# Altium PCB ETR_CELLMETER_SLAVE.PcbDoc (part 3 of 3)
Units mm, origin at the board's own origin, x right, y up, seen from the top; angles counter-clockwise.
Board outline 150 x 85 mm, 4 copper layers (Top Layer, GND, PWR, Bottom Layer), stack 1.306 mm thick; 204 components, 127 nets, 635 pads, 234 vias.
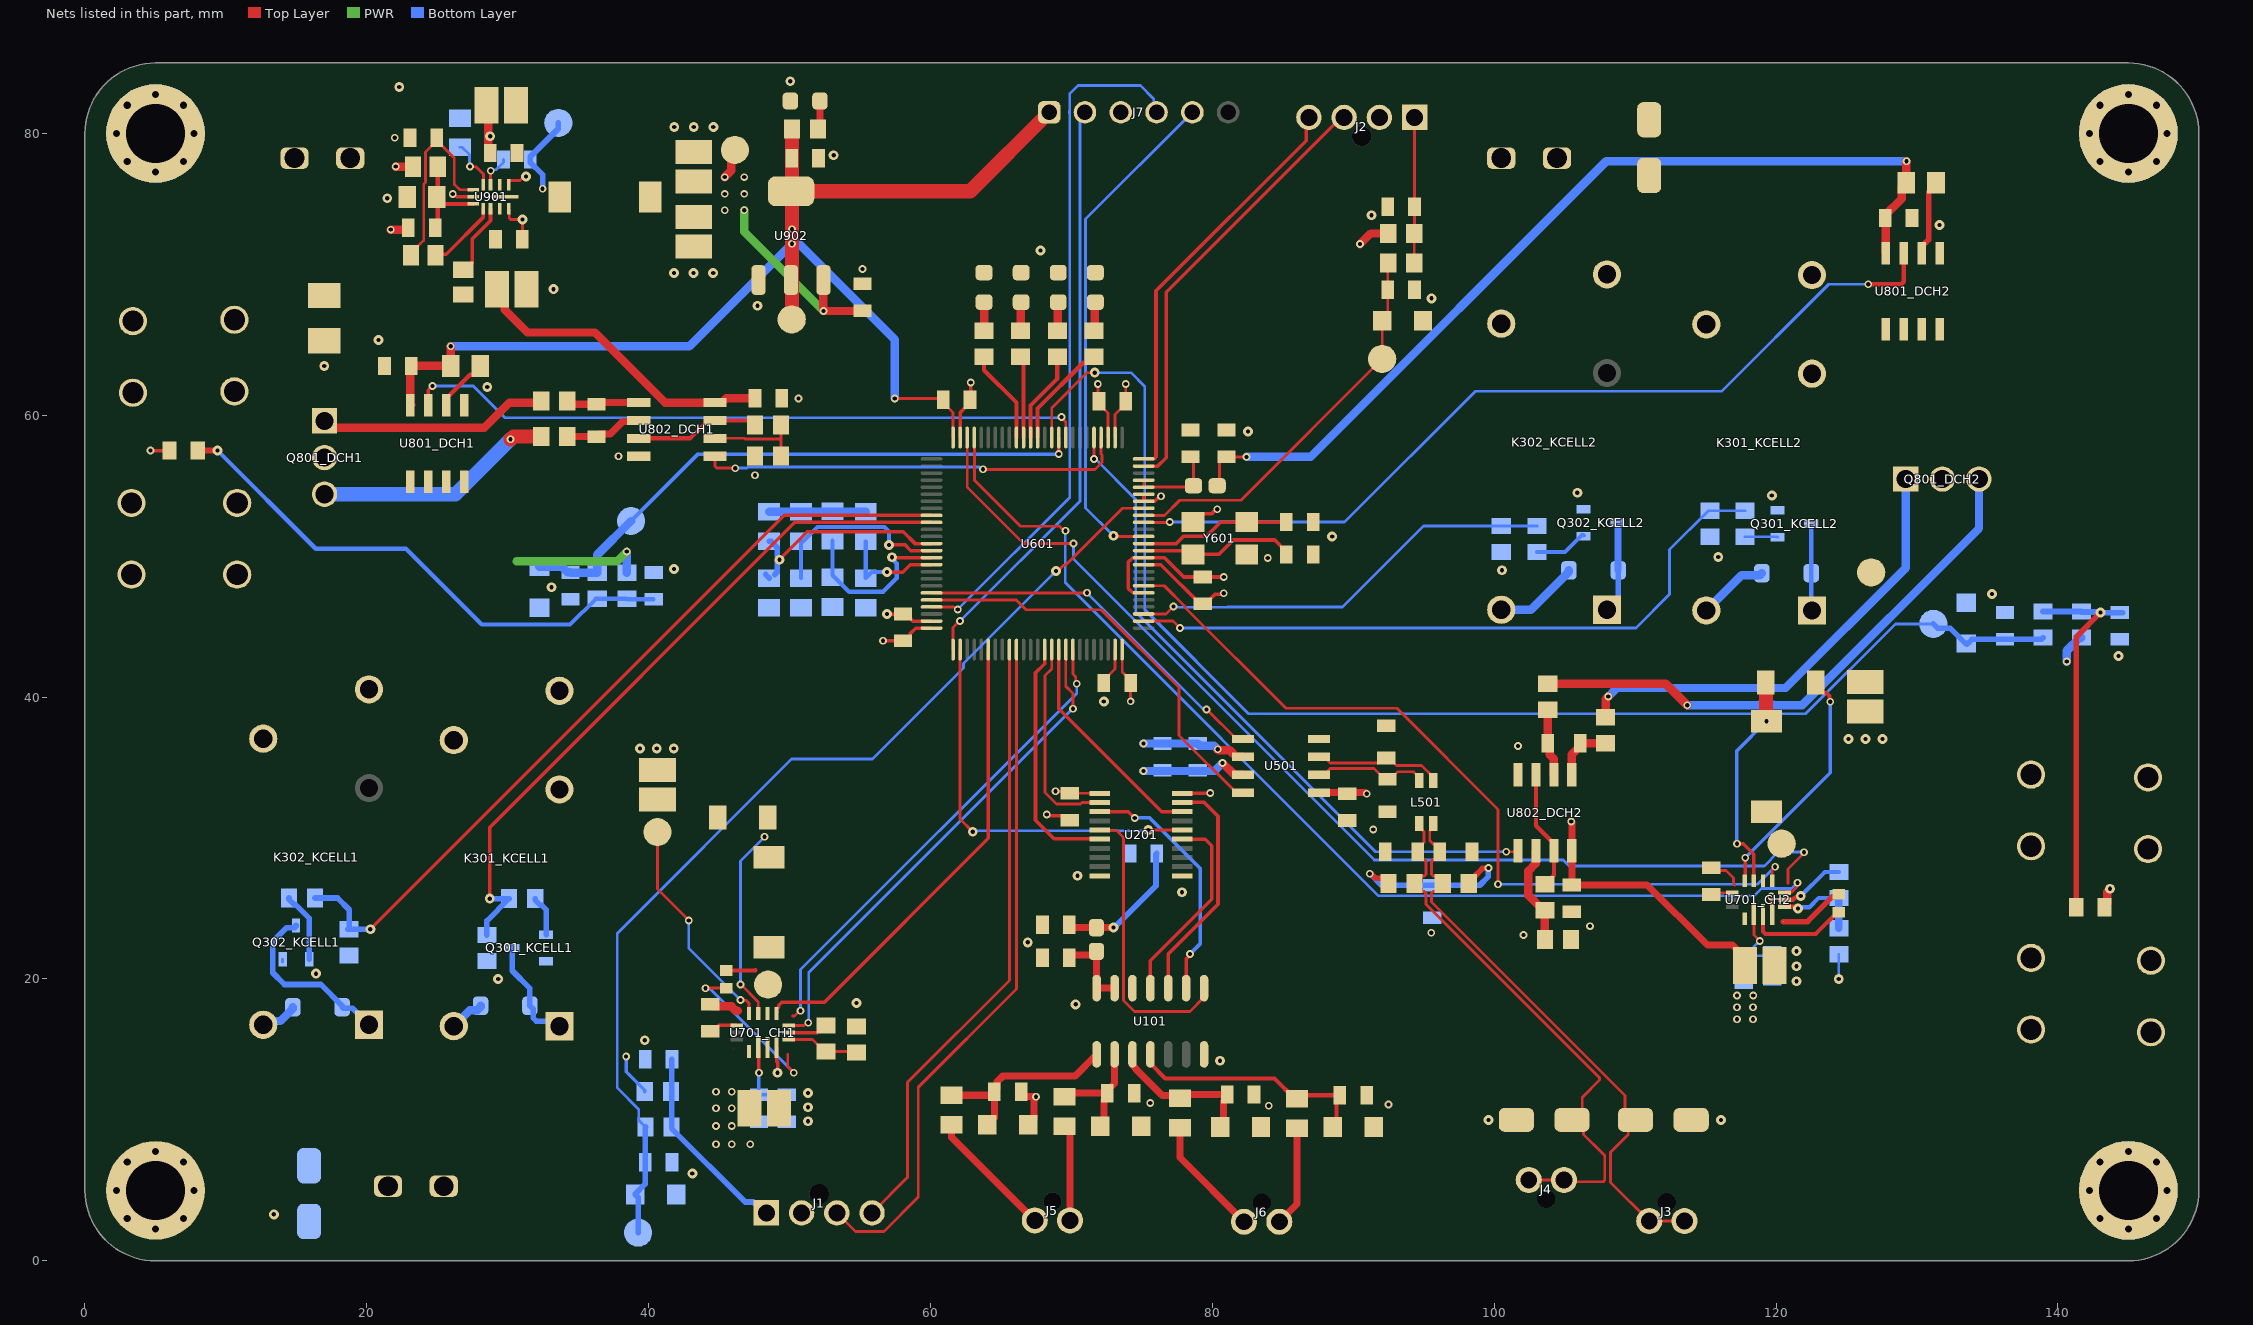
[diagram p4: the nets of this part, all layers, seen from the top]

## Part data (continued)
U902: library part LDO_10V-0.8/3V3-SOT223, "LDO Regulator Pos 3.3V 0.8A 4-Pin(3+Tab) SOT-223 T/R / IC REG LDO 3.3V 0.8A SOT223", Case/Package=SOT-223, Current Rating=800A, Dropout Voltage=1.2V, Manufacturer="Texas Instruments", Max Input Voltage=15V, Max Operating Temperature=125°C, Max Output Current=800mA, Max Supply Voltage=10V, Min Input Voltage=2.6V, Min Operating Temperature=-40°C, Min Supply Voltage=4.75V, Nominal Output Voltage=3.3V, Output Voltage Accuracy=1%, Package Quantity=1000, Quiescent Current=15mA, Supplier Part Number 1=LM1117IMP-3.3/NOPBCT-ND, .Creator=GP, Accuracy=1%, Category=LDO, ComponentLink1Description=Datasheet, ComponentLink1URL=https://www.ti.com/lit/ds/symlink/lm1117.pdf?HQS=dis-mous-null-mousermode-dsf-pf-null-wwe&DCM=yes&ref_url=https%3A%2F%2Fwww.mouser.de%2F&distId=26, ComponentLink2Description="Where buy it", ComponentLink2URL=https://www.mouser.es/ProductDetail/Texas-Instruments/LM1117IMP-33-NOPB?qs=X1J7HmVL2ZFbpN1TgOsjYQ%3D%3D, ComponentLink3Description=https://datasheet.ciiva.com/27051/1281318-27051810.pdf?src-supplier=Jameco, ComponentLink3URL=https://datasheet.ciiva.com/27051/1281318-27051810.pdf?src-supplier=Jameco, ComponentLink4Description=https://datasheet.ciiva.com/8042/1670636-8042261.pdf?src-supplier=Element14, ComponentLink4URL=https://datasheet.ciiva.com/8042/1670636-8042261.pdf?src-supplier=Element14, ComponentLink5Description=https://datasheet.ciiva.com/1570/1849796-1570171.pdf?src-supplier=Farnell, ComponentLink5URL=https://datasheet.ciiva.com/1570/1849796-1570171.pdf?src-supplier=Farnell, ComponentLink6Description=https://datasheet.ciiva.com/14149/lm1117-eng-tds-14149980.pdf?src-supplier=Distrelec, ComponentLink6URL=https://datasheet.ciiva.com/14149/lm1117-eng-tds-14149980.pdf?src-supplier=Distrelec, ComponentLink7Description=https://datasheet.ciiva.com/46386/1882372-46386042.pdf?src-supplier=Element14, ComponentLink7URL=https://datasheet.ciiva.com/46386/1882372-46386042.pdf?src-supplier=Element14, ComponentLink8Description=https://datasheet.ciiva.com/3223/lm1117-n-3223515.pdf?src-supplier=Avnet, ComponentLink8URL=https://datasheet.ciiva.com/3223/lm1117-n-3223515.pdf?src-supplier=Avnet, ComponentLink9Description=https://datasheet.ciiva.com/6580/lm1117-n-6580030.pdf?src-supplier=Digi-Key, ComponentLink9URL=https://datasheet.ciiva.com/6580/lm1117-n-6580030.pdf?src-supplier=Digi-Key, ComponentLink10Description=https://datasheet.ciiva.com/6580/lm1117-n-6580026.pdf?src-supplier=Digi-Key, ComponentLink10URL=https://datasheet.ciiva.com/6580/lm1117-n-6580026.pdf?src-supplier=Digi-Key, Height=1.6mm, Lead Free="Lead Free", Length=6.5mm, Manufacturer Part Number=LM1117IMP-3.3/NOPB, Min Current Limit=800mA, Mount="Surface Mount", Number of Outputs=1, Number of Pins=4, Number of Regulators=1, Output Current=800mA, Output Type=Fixed, Output Voltage=3.3V, Packaging="Tape and Reel", Polarity=Positive, Pricing 1="1=1,41000, 10=1,26300, 25=1,19920, 100=0,98500, 250=0,92072, 500=0,81366 (USD)", Radiation Hardening=No, REACH SVHC="No SVHC", RoHS=Yes, RoHS Compliant=Yes, Supplier 1=Digi-Key, Termination=SMD/SMT, Width=3.56mm
Y601: library part CMP-003-00000-1, "WE-XTAL Quartz Crystal, SMT, CFPX-104, 16MHz, +/-50ppm", Case/Package=CFPX-104, Frequency=16MHz, Frequency Stability=+/-50ppm, Load Capacitance=18pF, Manufacturer="Wurth Elektronik", Operating Temperature Max=60°C, Operating Temperature Min=-10°C, Category=Crystals, Component Type=Standard, ComponentLink1Description="Website Link", ComponentLink1URL=https://www.we-online.com/redexpert/article/830030819?ad, ComponentLink2Description="Datasheet Link", ComponentLink2URL=https://www.we-online.com/redexpert/spec/830030819?ad, Design Item ID=830030819, Frequency Tolerance=+/-50ppm, Height=1mm, Length=5mm, Manufacturer Part Number=830030819, Match Code=WE-XTAL, Mount="Surface Mount", Packaging="Tape and Reel", Pins=4, Source=WE-XTAL.SchLib, Width=3.2mm
Z101 Z102 Z103 Z104 Z401_NTC1 Z401_NTC2 Z401_NTC3 Z401_NTC4: library part CMP-004-00008-1, "Zener Diode, 5.1V V(Z), 2%, 0.8W, Silicon, Unidirectional, DO-219AB", Max Operating Temperature=175°C, Min Operating Temperature=-65°C, Pins=2, RoHS Compliant=Yes

## Via types
v1: diameter 0.55, hole 0.3, Top Layer to Bottom Layer, 106 vias
v2: diameter 0.7, hole 0.3, Top Layer to Bottom Layer, tented both sides, 76 vias
v3: diameter 0.7, hole 0.5, Top Layer to Bottom Layer, tented both sides, 32 vias
v4: diameter 0.55, hole 0.3, Top Layer to Bottom Layer, tented both sides, 11 vias
v5: diameter 4.4, hole 4.2, Top Layer to Bottom Layer, tented both sides, 4 vias
v6: diameter 2.5, hole 2.3, Top Layer to Bottom Layer, tented both sides, 3 vias
v7: diameter 0.7, hole 0.3, Top Layer to Bottom Layer, 2 vias

## Nets (pads, with @x,y where several pads share a name; then routed paths per layer and width w, separated by ;. In a path a pad name is that pad's centre, name@x,y a point inside that pad or via, vN(x,y) a via of type N, cw(c..) or ccw(c..) an arc to the next point about the centre after c; other vN are vias at no path point)
3V3_A: C602.2 L601.2 U601.21 U601.22 | length 6.2
  Top Layer w0.2: U601.22@75.125,55.4 U601.21@75.125,54.9 75.135,54.91 78.57,54.91 L601.2@78.66,55 78.66,56.84 C602.2@78.45,57.05
3V3_MCU: C201.2 C505.2 C601.2 C603.2 C604.2 C605.2 C606.2 C607.2 C801_DCH1.1 C801_DCH2.1 C910.2 J7.1 L601.1 R801_DCH1.2 R801_DCH2.2 R906.2 TP903.1 U201.1 U501.5 U601.6 U601.11 U601.28 U601.50 U601.75 U601.100 U801_DCH1.8 U801_DCH2.8 U902.2 U902.4 | length 184.8
  Top Layer w0.2: v1(57.458,61.2) 60.55,61.2 60.85,60.9 60.9,60.9 61.6,60.2 U601.50@61.6,58.425 ; v1(68.864,33.314) 69.736,33.314 C201.2@69.875,33.175 U201.1@72.025,33.175 ; v1(71.875,62.225) 71.875,61.075 C603.2@71.95,61 71.95,60.8 72.6,60.15 U601.28@72.6,58.425 ; U601.100@73.6,43.375 73.6,41.8 74.2,41.2 C605.2@74.2,41 v1(74.2,39.7) ; L601.1@80.34,55 80.5,55.16 80.5,56.7 80.85,57.05 C601.2@81,57.05 v1(82.425,57.05)
  Top Layer w0.25: v1(56.631,43.995) C606.2@58.042,43.995 58.242,43.995 58.567,44.32 58.567,44.52 58.946,44.9 U601.75@60.075,44.9 ; U601.6@75.125,47.4 74.339,47.4 74.025,47.714 74.025,49.586 74.339,49.9 U601.11@75.125,49.9 76.6,49.9 77.975,48.525 v1(80.8,48.525)
  Top Layer w0.5: U501.5@87.575,33.22 90.866,33.22 90.936,33.15 v1(90.95,33.15)
  Top Layer w0.6: U801_DCH1.8@23.15,60.755 U801_DCH1.8@23.095,60.7 23.095,63.445 C801_DCH1.1@23.15,63.5 R801_DCH1.2@25.95,63.5 v1(25.95,64.9) ; U801_DCH2.8@127.795,71.5 127.79,71.505 127.79,73.96 C801_DCH2.1@127.75,74 127.75,74.2 128.925,75.375 128.925,76.175 R801_DCH2.2@129.25,76.5 v1(129.25,78.025)
  Top Layer w1: U902.4@50.1,75.9 U902.4@50.163,75.9 ; TP903.1@50.15,66.8 50.163,66.813 v1(50.163,72.175) v1(50.163,73.2) U902.4@50.163,75.9 ; R906.2@50.175,80.3 50.163,80.288 U902.4@50.163,75.9 ; J7.1@68.42,81.5 62.82,75.9 U902.4@50.163,75.9
  Bottom Layer w0.6: v1(25.95,64.9) 42.888,64.9 v1(50.163,72.175) 50.66,72.175 57.458,65.377 v1(57.458,61.2) ; v1(82.425,57.05) 86.975,57.05 107.95,78.025 v1(129.25,78.025)
+3V3: R601.2 R602.2 R603.2 R604.2 | length 6.9
  Bottom Layer w0.6: R601.2@48.55,53.15 R602.2@50.8,53.15 53.05,53.15 R604.2@55.4,53.15
+5V: C105.2 C202.2 C501.2 C502.2 C902.2 C903.2 C904.2 C911.2 D301_KCELL1.K D301_KCELL2.K D302_KCELL1.K D302_KCELL2.K K301_KCELL1.A2 K301_KCELL2.A2 K302_KCELL1.A2 K302_KCELL2.A2 L101.1 L901.2 R401_NTC1.2 R401_NTC2.2 R401_NTC3.2 R401_NTC4.2 R902.2 TP902.1 U201.20 U501.3 U902.3 | length 72
  Top Layer w0.25: U201.20@77.875,33.175 79.75,33.175 79.775,33.2 v1(79.85,33.2)
  Top Layer w0.5: C105.2@69.852,23.85 69.852,23.84 70.052,23.64 L101.1@71.728,23.64 ; L101.1@71.771,23.64 71.776,23.644 72.976,23.644 v2(72.98,23.649)
  Top Layer w0.6: v1(21.7,73.175) 22.825,73.175 C904.2@22.95,73.3 ; v1(22.05,77.65) R902.2@23.283,77.65 ; v1(45.4,76.9) 45.85,77.35 45.85,78.56 TP902.1@46.118,78.828 ; U902.3@52.4,69.6 v1(52.4,67.4) 55.15,67.4 C911.2@55.175,67.425 ; v1(80.725,35.325) 81.56,34.49 U501.3@82.175,34.49 ; v1(90.475,72.15) 91.225,72.9 R401_NTC1.2@92.475,72.9
  PWR w0.6: 30.631,49.65 37.775,49.65 v1(38.45,50.325) ; v1(46.787,74.55) 46.787,73.013 v1(52.4,67.4)
  Bottom Layer w0.25: v1(38.4,14.5) 38.4,13.425 39.725,12.1 R401_NTC2.2@39.725,12
  Bottom Layer w0.4: v2(72.98,23.649) 73.034,23.649 76,26.615 76,28.85 C202.2@76.05,28.9
  Bottom Layer w0.6: K302_KCELL1.A2@12.65,16.75 12.918,17.018 13.868,17.018 14.75,17.9 D302_KCELL1.K@14.75,18 ; K301_KCELL1.A2@26.17,16.65 27.296,17.776 27.82,17.776 28.07,18.026 D301_KCELL1.K@28.07,18.1 ; R401_NTC3.2@38.45,48.825 v1(38.45,50.325) ; v1(75.11,34.76) 80.16,34.76 v1(80.725,35.325) ; K302_KCELL2.A2@100.5,46.2 102.6,46.2 105.3,48.9 D302_KCELL2.K@105.3,49 ; K301_KCELL2.A2@115.05,46.15 117.55,48.65 118.85,48.65 D301_KCELL2.K@119,48.8 ; v1(140.625,42.525) 140.625,43.289 141.561,44.225 R401_NTC4.2@141.661,44.225
  other v1: 45.4,74.55 45.4,75.713 46.787,75.713 46.787,76.9
+12V: C705_CH1.2 C705_CH2.2 C803_DCH1.2 C803_DCH2.2 C905.2 C906.2 C907.2 C908.2 D901.2 J8.1 R901.2 U701_CH1.1 U701_CH2.1 U802_DCH1.8 U802_DCH2.8 U901.2 U901.10 | length 42.2
  Top Layer w0.2: D901.2@16.725,68.5 D901.2@16.975,68.5
  Top Layer w0.5: v1(105.475,31.175) 105.475,31.161 105.505,31.131 U802_DCH2.8@105.505,29.1 C803_DCH2.2@105.505,26.675 110.85,26.675 115.125,22.4 116.905,22.4 117.198,22.107 117.198,21.551 C705_CH2.2@117.799,20.95
  Top Layer w0.6: C905.2@29.125,69.049 C905.2@29.224,68.95 29.776,68.399 29.776,67.499 31.4,65.875 36.187,65.875 41.157,60.905 U802_DCH1.8@44.7,60.905 45.2,60.905 45.495,61.2 C803_DCH1.2@47.55,61.2
  other v1: 44.775,8.275 45.9,8.275 47.2,8.275 44.775,9.575 45.9,9.575 44.775,10.825 45.9,10.825 44.775,12 45.9,12 117.224,17.15 118.356,17.15 117.224,17.988 118.356,17.988 117.224,18.825 118.375,18.825
CAN1_H: C504.2 D501.2 J3.1 J3.2 L501.2 R501.2 | length 40.2
  Top Layer w0.2: L501.2@95.675,31.025 95.475,30.825 95.475,30.531 95.427,30.483 95.427,30.024 95.427,29.815 95.667,29.575 95.775,29.575 96.125,29.225 C504.2@96.125,29.025 96.125,28.825 95.775,28.475 95.667,28.475 95.55,28.358 95.55,27.425 95.667,27.308 95.875,27.308 96.35,26.833 R501.2@96.35,26.775 96.35,26.675 95.875,26.2 95.667,26.2 95.55,26.083 95.55,25.473 109.291,11.733 109.291,10.725 110.016,10 D501.2@110.025,10 109.509,9.484 109.509,8.967 108.25,7.708 108.25,5.57 J3.2@111,2.82 J3.1@113.5,2.82
CAN1_L: C508.1 D502.1 J4.1 J4.2 L501.3 R502.1 | length 39.4
  Top Layer w0.2: L501.3@94.675,31.025 94.675,30.8 95.027,30.448 95.027,29.858 95.027,29.677 94.575,29.225 C508.1@94.575,29.025 94.575,28.825 94.925,28.475 95.033,28.475 95.15,28.358 95.15,27.425 95.033,27.308 94.825,27.308 94.35,26.833 R502.1@94.35,26.775 94.35,26.675 94.825,26.2 95.033,26.2 95.15,26.083 95.15,25.308 107.471,12.987 107.471,12.821 106.25,11.6 106.25,10.513 105.737,10 D502.1@105.525,10 105.616,10 106.341,9.275 106.341,8.967 107.666,7.642 107.85,7.458 107.85,5.728 107.733,5.611 105.079,5.611 J4.2@104.95,5.74 J4.1@102.45,5.74
CAN_FIL_H: C503.1 L501.1 U501.7 | length 9.3
  Top Layer w0.2: U501.7@87.575,35.76 88.05,35.76 88.25,35.56 88.25,35.442 88.367,35.325 91.8,35.325 92.15,35.675 C503.1@92.35,35.675 92.55,35.675 93.075,35.15 94.849,35.15 95.099,34.9 95.475,34.524 95.475,34.275 L501.1@95.675,34.075
CAN_FIL_L: C507.2 L501.4 U501.6 | length 8.3
  Top Layer w0.2: U501.6@87.575,34.49 88.05,34.49 88.25,34.69 88.25,34.808 88.367,34.925 91.475,34.925 92.225,34.175 C507.2@92.425,34.175 92.625,34.175 93.15,34.7 93.725,34.7 94.275,34.7 94.675,34.3 L501.4@94.675,34.075
CELL1+: D1.2 J9.1 K302_KCELL1.11
CELL1_LED1: J1.3 U601.85 | length 49.1
  Top Layer w0.2: J1.3@53.35,3.4 54.667,2.083 56.693,2.083 59.133,4.523 59.133,12.317 66.1,19.284 U601.85@66.1,43.375
CELL1_LED2: J1.4 U601.84 | length 44
  Top Layer w0.2: J1.4@55.85,3.4 58.377,5.927 58.377,12.677 65.6,19.9 U601.84@65.6,43.375
CELL2+: D2.2 J10.1 K302_KCELL2.11
CELL2_LED1: J2.3 U601.24 | length 31.3
  Top Layer w0.25: U601.24@75.125,56.4 76.136,56.4 76.734,56.998 76.734,68.734 89.14,81.14 J2.3@89.35,81.14
CELL2_LED2: J2.4 U601.25 | length 29.5
  Top Layer w0.25: U601.25@75.125,56.9 75.854,56.9 76,57.046 76,68.825 86.668,79.493 86.668,80.958 J2.4@86.85,81.14
CH1_INT: U601.81 U701_CH1.10 | length 33.8
  Top Layer w0.25: U701_CH1.10@49.075,17.55 49.075,17.85 49.241,18.016 49.241,18.134 49.457,18.35 52.475,18.35 64.1,29.975 U601.81@64.1,43.375
CH2_INT: U601.7 U701_CH2.10 | length 58.3
  Top Layer w0.2: U601.7@75.125,47.9 76.581,47.9 78.058,46.423 78.058,46.368 85.217,39.209 93.091,39.209 100.275,32.025 v1(100.275,26.725) ; U701_CH2.10@119.725,26.975 119.725,27.759 v1(119.935,27.968)
  Bottom Layer w0.2: v1(100.275,26.725) 118.691,26.725 v1(119.935,27.968)
DAC_OUT1: U601.29 U802_DCH1.5 | length 30.4
  Top Layer w0.2: U802_DCH1.5@44.7,57.095 44.7,56.367 44.817,56.25 v1(46.15,56.25) ; v1(63.725,56.175) 63.75,56.15 71.663,56.15 72.175,56.662 72.175,57.174 72.1,57.249 U601.29@72.1,58.425
  Bottom Layer w0.2: v1(46.15,56.25) 46.979,56.25 47.054,56.325 63.48,56.325 63.63,56.175 v1(63.725,56.175)
DAC_OUT2: U601.30 U802_DCH2.5 | length 47.9
  Top Layer w0.2: v1(71.6,56.9) U601.30@71.6,58.425 ; v4(100.85,29.025) 101.62,29.025 U802_DCH2.5@101.695,29.1
  Bottom Layer w0.2: v1(71.6,56.9) 71.695,56.9 74.564,54.03 74.564,46.036 91.575,29.025 v4(100.85,29.025)
DCH_NTC1_ADC: C402_NTC3.2 R402_NTC3.2 TP401_NTC3.1 U601.35 Z401_NTC3.2 | length 42.4
  Top Layer w0.25: v1(69.1,57.25) U601.35@69.1,58.425
  Bottom Layer w0.25: TP401_NTC3.1@38.75,52.5 43.5,57.25 v1(69.1,57.25)
  Bottom Layer w0.6: Z401_NTC3.2@32.25,49.25 33.85,49.25 34.25,48.85 C402_NTC3.2@34.45,48.85 34.462,48.837 36.337,48.837 R402_NTC3.2@36.35,48.825 36.35,50.1 TP401_NTC3.1@38.75,52.5
DCH_NTC2_ADC: C402_NTC4.2 R402_NTC4.2 TP401_NTC4.1 U601.36 Z401_NTC4.2 | length 96.2
  Top Layer w0.2: U601.36@68.6,58.425 68.6,60.516 71.109,63.025 v2@71.641,63.025
  Bottom Layer w0.2: v2(71.65,63.025) 74.225,63.025 75.2,62.05 75.2,46.2 82.575,38.825 119.037,38.825 119.074,38.863 119.551,38.863 119.588,38.825 122.099,38.825 128.474,45.2 TP401_NTC4.1@131.161,45.2
  Bottom Layer w0.4: TP401_NTC4.1@131.161,45.2 131.467,44.894 132.356,44.894 133.45,43.8 Z401_NTC4.2@133.5,43.8 ; Z401_NTC4.2@133.55,43.75 133.9,44.1 C402_NTC4.2@136.244,44.1 138.818,44.1 R402_NTC4.2@138.943,44.225
GND: C101.1 C102.1 C103.1 C104.1 C105.1 C106.1 C201.1 C202.1 C401_NTC1.1 C401_NTC2.1 C401_NTC3.1 C401_NTC4.1 C402_NTC1.1 C402_NTC2.1 C402_NTC3.1 C402_NTC4.1 C501.1 C502.1 C503.2 C504.1 C505.1 C506.2 C507.1 C508.2 C601.1 C602.1 C603.1 C604.1 C605.1 C606.1 C607.1 C608.2 C609.2 C702_CH1.1 C702_CH2.1 C703_CH1.1 C703_CH2.1 C704_CH1.1 C704_CH2.1 C705_CH1.1 C705_CH2.1 C706_CH1.1 C706_CH2.1 C801_DCH1.2 C801_DCH2.2 C803_DCH1.1 C803_DCH2.1 C902.1 C903.1 C905.1 C906.1 C907.1 C908.1 C909.1 C910.1 C911.1 D1.1 D2.1 D501.1 D502.2 D601.K D602.K D603.K D604.K D901.1 D902.K J1.2 J2.2 J7.3 J8.2 J9.2 J10.2 MH1.1 MH2.1 MH3.1 MH4.1 NTC801_DCH1.2 NTC801_DCH2.2 Q301_KCELL1.S Q301_KCELL2.S Q302_KCELL1.S Q302_KCELL2.S R302_KCELL1.1 R302_KCELL2.1 R304_KCELL1.1 R304_KCELL2.1 R605.1 R606.1 R607.1 R608.1 R703_CH1.1 R703_CH2.1 R803_DCH1.1 R803_DCH2.1 R806_DCH1.2 R806_DCH2.2 R807_DCH1.1 R807_DCH2.1 R808_DCH1.1 R808_DCH2.1 R809_DCH1.2 R809_DCH2.2 R904.1 R905.1 U101.7 U101.12 U201.10 U201.11 U501.2 U501.8 U601.10 U601.19 U601.20 U601.27 U601.49 U601.74 U601.99 U701_CH1.4 U701_CH1.14 U701_CH2.4 U701_CH2.14 U801_DCH1.5 U801_DCH2.5 U802_DCH1.4 U802_DCH2.4 U901.1 U901.6 U901.11 U902.1 Y601.2 Y601.4 Z101.1 Z102.1 Z103.1 Z104.1 Z401_NTC1.1 Z401_NTC2.1 Z401_NTC3.1 Z401_NTC4.1 | length 62.6
  Top Layer w0.2: v5(5,5) MH3.1@5.528,4.472 ; U901.11@30.075,74.65 30.1,74.625 30.1,74.017 30.217,73.9 v2(31.05,73.9) 31.05,72.525 C907.1@31.025,72.5 ; U901.1@30.075,76.35 30.075,76.625 30.1,76.65 30.867,76.65 31.167,76.95 v2(31.302,76.95) ; C605.1@72.499,40.801 C605.1@72.3,41 72.3,41.2 73.1,42 U601.99@73.1,43.375 ; U601.27@73.1,58.425 73.1,60.05 73.85,60.8 v1(73.85,62.225) ; U101.7@79.41,14.65 79.41,14.385 U101.7@79.595,14.2 ; Y601.4@82.325,50.125 Y601.4@82.425,50.125 ; C401_NTC1.1@92.1,74.4 92.45,74.75 C401_NTC1.1@92.45,74.8 ; C706_CH2.1@115.4,27.7 116.455,27.7 U701_CH2.14@116.979,27.176 116.979,26.77 117.074,26.675 ; C705_CH2.1@119.725,21.401 C705_CH2.1@119.901,21.225 ; C705_CH2.1@119.901,20.95 C705_CH2.1@119.926,20.925
  Top Layer w0.25: v1(4.654,57.5) NTC801_DCH1.2@6,57.5 ; v1(26.1,75.7) 26.181,75.7 26.381,75.5 U901.6@27.55,75.5 ; U701_CH1.4@49.075,15.15 49.1,15.125 49.1,14.125 49.15,14.075 v2(49.15,13.35) ; v2(56.908,45.895) C606.1@58.042,45.895 58.242,45.895 58.737,45.4 U601.74@60.075,45.4 ; U601.49@62.1,58.425 62.1,60.2 62.8,60.9 C607.1@62.8,61.1 62.85,61.15 v1(62.85,62.325) ; v1(68.25,31.675) 68.331,31.675 68.406,31.6 69.35,31.6 C201.1@69.675,31.275 ; U601.10@75.125,49.4 76.35,49.4 79.125,46.625 79.525,46.625 80.218,47.318 80.743,47.318 v1(80.8,47.375) ; U601.20@75.125,54.4 U601.19@75.125,53.9 75.919,53.9 76.269,54.25 v4(76.35,54.25) ; Y601.2@78.625,52.425 79.2,53 79.934,53 80.259,53.325 v4(80.34,53.325) ; v1(119.666,25.85) 119.666,25.284 119.7,25.25 119.7,24.6 U701_CH2.4@119.725,24.575
  Top Layer w0.5: C101.1@66.43,12 66.43,11.86 66.63,11.66 67.47,11.66 v4(67.48,11.65) 67.48,11.636 67.33,11.486 67.33,10.05 Z101.1@66.93,9.65
  Top Layer w0.6: C906.1@28.499,82 28.625,81.875 28.625,78.741 C908.1@28.75,78.616 ; C706_CH1.1@44.375,18.2 44.525,18.05 45.879,18.05 46.178,17.751 U701_CH1.14@46.329,17.751 ; v1(80.375,36.3) 80.445,36.23 81.23,36.23 81.7,35.76 U501.2@82.175,35.76 ; NTC801_DCH2.2@143.3,25.1 143.5,25.3 143.5,26.173 143.7,26.373 v2(143.7,26.4)
  Bottom Layer w0.2: Q302_KCELL1.S@14.025,21.2 Q302_KCELL1.S@14.025,21.4 ; v2(124.45,20) R703_CH2.1@124.45,21.75
  Bottom Layer w0.6: v1(75.11,36.71) C502.1@76.46,36.71 C501.1@78.96,36.71 79.11,36.56 80.115,36.56 v1(80.375,36.3)
  other v1: 95.525,23.275 91.412,30.6 101.695,36.525 47.55,55.75 37.85,57.095 50.625,61.2 55.175,70.375 21.988,79.691
  other v2: 13.4,3.3 43.1,6.2 51.3,9.9 99.6,10 116.1,10 51.3,10.9 51.3,11.9 80.55,14.2 39.725,15.65 70.3,18.2 54.75,18.3 121.455,19.838 29.32,20 16.399,20.378 121.455,20.906 121.455,21.975 66.9,22.6 77.85,26.15 70.425,27.325 39.375,36.35 40.575,36.35 41.775,36.35 125.15,37.025 126.35,37.025 127.55,37.025 72.3,39.7 144.3,42.925 135.325,47.325 33.1,47.8 100.55,49 41.8,49.1 115.9,49.95 88.5,51.4 119.7,54.3 105.9,54.5 82.525,58.85 28.546,62.005 16.975,63.5 20.825,65.35 47.725,67.775 95.55,68.3 33.25,68.95 41.8,70.1 43.188,70.1 44.575,70.1 67.8,71.7 131.6,73.5 91.3,74.2 21.45,75.4 53.125,78.45 28.75,79.8 41.812,80.45 43.2,80.45 44.588,80.45 22.3,83.3 50.05,83.7
  other v3: 5,2.25 145,2.25 3,3 7,3 143,3 147,3 2.25,5 7.75,5 142.25,5 147.75,5 3,7 7,7 143,7 147,7 5,7.75 145,7.75 5,77.25 145,77.25 3,78 7,78 143,78 147,78 2.25,80 7.75,80 142.25,80 147.75,80 3,82 7,82 143,82 147,82 5,82.75 145,82.75
  other v4: 84,11 92.5,11.1 75.6,11.207 102.075,23.125 106.8,23.75 83.925,49.875
  other v5: 145,5 5,80 145,80
I2C1_SCL: U601.92 U701_CH1.8 | length 35.9
  Top Layer w0.2: U701_CH1.8@49.95,16.7 51.03,16.7 51.23,16.9 v1(51.325,16.9) ; U601.92@69.6,43.375 69.6,40.77 70.105,40.264 v1(70.105,39.173)
  Bottom Layer w0.2: v1(51.325,16.9) 51.357,16.932 51.357,20.457 70.073,39.173 v1(70.105,39.173)
I2C1_SDA: U601.93 U701_CH1.9 | length 34.6
  Top Layer w0.2: U701_CH1.9@50.201,17.364 50.354,17.364 50.74,17.75 v1(50.782,17.75) ; U601.93@70.1,43.375 70.1,41.645 70.308,41.437 70.308,41.017 v1(70.375,40.95)
  Bottom Layer w0.2: v1(50.782,17.75) 50.782,20.663 70.375,40.256 v1(70.375,40.95)
I2C2_SCL: U601.47 U701_CH2.8 | length 77.6
  Top Layer w0.2: U601.47@63.1,58.425 63.11,58.415 63.11,55.39 66.375,52.125 69.155,52.125 69.48,51.8 v1(69.575,51.8) ; U701_CH2.8@120.6,26.125 120.65,26.175 121.116,26.175 121.449,26.508 121.449,26.767 v1(121.516,26.834)
  Bottom Layer w0.2: v1(69.575,51.8) 69.563,51.788 69.563,48.124 91.787,25.9 118.432,25.9 118.957,26.425 121.107,26.425 v1(121.516,26.834)
I2C2_SDA: U601.48 U701_CH2.9 | length 77.8
  Top Layer w0.2: U601.48@62.6,58.425 62.6,54.9 66.6,50.9 v4(70.138,50.9) ; U701_CH2.9@120.851,26.789 120.851,27.807 121.975,28.931 v1(121.975,29)
  Bottom Layer w0.2: v4(70.138,50.9) 70.138,49.805 91.494,28.45 104.898,28.45 105.323,28.025 119.171,28.025 120.146,29 v1(121.975,29)
ID1: R601.1 R605.2 U601.63 | length 14.9
  Top Layer w0.25: v2(49.275,49.75) 51.261,51.736 58.058,51.736 58.894,50.9 U601.63@60.075,50.9
  Bottom Layer w0.4: R605.2@48.3,48.7 R605.2@48.55,48.45 ; R601.1@48.55,51.05 48.7,51.05 49.125,50.625 v2@49.125,49.981 ; R605.2@48.95,48.7 49.125,48.875 49.125,49.6 v2(49.275,49.75)
ID2: R602.1 R606.2 U601.64 | length 13.6
  Top Layer w0.25: v2(57.05,50.8) 58.194,50.8 58.594,50.4 U601.64@60.075,50.4
  Bottom Layer w0.3: R606.2@50.8,48.45 R602.1@50.8,51.05 50.95,51.05 51.975,52.075 56.729,52.075 57.05,51.754 v2(57.05,50.8)
ID3: R603.1 R607.2 U601.65 | length 12.3
  Top Layer w0.25: v2(57.272,49.928) 57.3,49.9 U601.65@60.075,49.9
  Bottom Layer w0.3: R603.1@53.05,51.1 53.05,48.65 54.225,47.475 56.64,47.475 57.608,48.443 57.608,49.484 57.272,49.82 v2(57.272,49.928)
ID4: R604.1 R608.2 U601.66 | length 7.7
  Top Layer w0.25: v2(56.908,48.875) 58.042,48.875 58.567,49.4 U601.66@60.075,49.4
  Bottom Layer w0.3: R604.1@55.4,51.05 R608.2@55.4,48.45 55.825,48.875 v2(56.908,48.875)
MCU_ADC_S1: U601.34 U801_DCH1.7 | length 48.7
  Top Layer w0.2: v1(69.302,59.875) 69.302,59.828 69.6,59.53 U601.34@69.6,58.425
  Top Layer w0.25: U801_DCH1.7@24.365,60.7 24.365,61.784 v1(24.656,62.075)
  Bottom Layer w0.2: v1(24.656,62.075) 27.556,62.075 29.806,59.825 69.252,59.825 v1(69.302,59.875)
MCU_ADC_S2: U601.16 U801_DCH2.7 | length 63
  Top Layer w0.2: U601.16@75.125,52.4 76.951,52.4 v1(76.976,52.425)
  Top Layer w0.3: v1(126.55,69.3) 128.884,69.3 129.06,69.476 129.06,71 129.065,71.005 U801_DCH2.7@129.065,71.5
  Bottom Layer w0.2: v1(76.976,52.425) 89.375,52.425 98.65,61.7 116.138,61.7 123.738,69.3 v1(126.55,69.3)
NetC101_2: C101.2 R101.1 U101.1 Z101.2 | length 14.3
  Top Layer w0.5: R101.1@61.5,11.75 64.28,11.75 C101.2@64.53,12 ; Z101.2@64.03,9.65 64.53,10.15 64.53,11.75 C101.2@64.53,12 ; U101.1@71.79,14.65 70.24,13.1 65.123,13.1 64.73,12.707 64.73,12.2 C101.2@64.53,12
NetC102_2: C102.2 R102.1 U101.2 Z102.2 | length 8.7
  Top Layer w0.5: R102.1@69.5,11.65 69.75,11.9 C102.2@72.55,11.9 ; Z102.2@72.05,9.55 72.3,9.8 72.3,11.45 72.55,11.7 C102.2@72.55,11.9 ; U101.2@73.06,14.65 73.06,12.593 72.767,12.3 72.75,12.3 72.55,12.1 C102.2@72.55,11.9
NetC103_2: C103.2 R103.1 U101.3 Z103.2 | length 11.1
  Top Layer w0.5: U101.3@74.33,14.65 74.33,13.892 74.6,13.622 74.6,13.586 76.468,11.718 77.532,11.718 R103.1@77.7,11.55 77.95,11.8 80.8,11.8 C103.2@81.05,11.8 81.05,11.6 80.8,11.35 80.8,9.75 Z103.2@80.55,9.5
NetC104_2: C104.2 R104.1 U101.4 Z104.2 | length 17.7
  Top Layer w0.3: U101.4@75.6,14.65 75.6,14 76.653,12.947 84.403,12.947 85.85,11.5 R104.1@86,11.5 86.25,11.75 88.8,11.75 C104.2@89.05,11.75 89.05,11.55 88.8,11.3 88.8,9.75 Z104.2@88.55,9.5
NetC106_2: C106.2 L101.2 U101.13 U101.14 | length 6
  Top Layer w0.5: C106.2@69.852,21.5 69.852,21.502 70.052,21.702 71.514,21.702 L101.2@71.771,21.96 ; L101.2@71.79,21.952 U101.14@71.79,19.35 U101.13@73.06,19.35
NetC401_NTC3_2: C401_NTC3.2 NTC801_DCH1.1 R401_NTC3.1 R402_NTC3.1 | length 38.2
  Top Layer w0.4: NTC801_DCH1.1@8,57.5 v7(9.4,57.5)
  Bottom Layer w0.3: v7(9.4,57.5) 16.373,50.527 22.773,50.527 28.15,45.15 34.425,45.15 36.25,46.975 R402_NTC3.1@36.35,46.975 R401_NTC3.1@38.45,46.975 38.475,46.95 C401_NTC3.2@40.35,46.95
NetC401_NTC4_2: C401_NTC4.2 NTC801_DCH2.1 R401_NTC4.1 R402_NTC4.1 | length 27.3
  Top Layer w0.4: NTC801_DCH2.1@141.3,25.1 141.3,44.275 v2(143.025,46)
  Bottom Layer w0.4: R402_NTC4.1@138.943,46.075 R401_NTC4.1@141.661,46.075 141.699,46.038 142.987,46.038 v2(143.025,46) C401_NTC4.2@144.6,46
NetC402_NTC1_2: C402_NTC1.2 R402_NTC1.2 TP401_NTC1.1 U601.17 Z401_NTC1.2 | length 28.5
  Top Layer w0.2: U601.17@75.125,52.9 76.61,52.9 77.685,53.975 82.025,53.975 TP401_NTC1.1@92.05,64 Z401_NTC1.2@92.05,66.7 92.45,67.1 C402_NTC1.2@92.45,68.9 92.45,70.775 R402_NTC1.2@92.475,70.8
NetC402_NTC2_2: C402_NTC2.2 R402_NTC2.2 TP401_NTC2.1 U601.18 Z401_NTC2.2 | length 72.5
  Top Layer w0.2: v7(68.913,48.953) 69.026,48.953 69.429,49.356 69.571,49.356 73.615,53.4 U601.18@75.125,53.4
  Bottom Layer w0.2: R402_NTC2.2@39.775,9.5 39.3,9.975 39.3,10.751 37.775,12.276 37.775,23.25 50.129,35.604 55.879,35.604 62.349,42.074 62.349,42.388 v7(68.913,48.953)
  Bottom Layer w0.4: TP401_NTC2.1@39.25,2 39.25,4.5 Z401_NTC2.2@39.05,4.7 39.05,4.75 39.75,5.45 C402_NTC2.2@39.75,7 39.762,7.013 39.762,9.487 R402_NTC2.2@39.775,9.5
NetC506_1: C506.1 R501.1 R502.2 | length 13.2
  Top Layer w0.4: v1(91.175,27.475) 91.204,27.446 91.298,27.446 91.586,27.159 92.125,27.159 92.5,26.784 R502.2@92.5,26.775 ; R501.1@98.2,26.775 98.475,27.05 98.475,27.15 99.171,27.846 99.571,27.846 v1(99.6,27.875)
  Bottom Layer w0.4: v1(91.175,27.475) 92,26.65 C506.1@95.6,26.65 98.975,26.65 99.571,27.246 99.571,27.846 v1(99.6,27.875)
NetC701_CH1_1: C701_CH1.1 L701_CH1.1 TP702_CH1.1 U701_CH1.3 U701_CH1.11 | length 1.6
  Top Layer w0.3: 45.999,20.6 47.55,20.6 47.575,20.625
NetC701_CH1_2: C701_CH1.2 U701_CH1.5 | length 11.7
  Top Layer w0.2: v1(44.026,19.35) C701_CH1.2@45.5,19.35 ; U701_CH1.5@49.871,14.649 49.871,13.779 v1(50.3,13.35)
  Bottom Layer w0.2: v1(44.026,19.35) 44.093,19.283 44.367,19.283 v1(50.3,13.35)
NetC701_CH2_1: C701_CH2.1 L701_CH2.1 TP702_CH2.1 U701_CH2.3 U701_CH2.11 | length 7.3
  Top Layer w0.3: U701_CH2.3@119.075,24.575 119.075,23.363 119.251,23.187 122.812,23.187 124.375,24.75 C701_CH2.1@124.45,24.75
NetC701_CH2_2: C701_CH2.2 U701_CH2.5 | length 4.7
  Top Layer w0.4: U701_CH2.5@120.521,24.074 122.229,24.074 123.98,25.825 124.225,25.825 C701_CH2.2@124.45,26.05
NetC702_CH1_2: C702_CH1.2 C703_CH1.2 U701_CH1.2 | length 5.4
  Top Layer w0.25: U701_CH1.2@47.775,15.15 47.8,15.125 47.8,13.375 v1(47.825,13.35)
  Bottom Layer w0.25: v1(47.825,13.35) C703_CH1.2@47.825,11.775 C702_CH1.2@49.8,11.775
NetC702_CH2_2: C702_CH2.2 C703_CH2.2 U701_CH2.2 | length 5.6
  Top Layer w0.2: U701_CH2.2@118.425,24.575 118.425,23.125 v1(118.85,22.7)
  Bottom Layer w0.2: C703_CH2.2@117.699,21.65 C703_CH2.2@117.899,21.65 ; v1(118.85,22.7) 118.443,22.293 118.443,22.194 C703_CH2.2@117.899,21.65 ; C702_CH2.2@119.725,21.9 119.475,21.65 C703_CH2.2@117.899,21.65
NetC704_CH1_2: C704_CH1.2 K301_KCELL1.12 R701_CH1.1 TP701_CH1.1 U701_CH1.13 | length 15.8
  Top Layer w0.2: TP701_CH1.1@40.625,30.425 40.625,26.375 v1(42.85,24.15) ; v1(46.52,18.505) 46.536,18.489 46.916,18.489 47.125,18.28 U701_CH1.13@47.125,17.55
  Bottom Layer w0.2: v1(42.85,24.15) 42.85,22.175 v1(46.52,18.505)
NetC704_CH2_2: C704_CH2.2 K301_KCELL2.12 R701_CH2.1 TP701_CH2.1 U701_CH2.13 | length 17.1
  Top Layer w0.25: U701_CH2.13@117.775,26.975 117.798,26.998 117.798,28.577 v1(117.821,28.6) ; R701_CH2.1@122.825,41.05 122.825,40.825 123.325,40.325 123.55,40.325 123.793,40.082 123.793,39.732 v1(123.85,39.675)
  Bottom Layer w0.25: v1(117.821,28.6) 123.85,34.629 v1(123.85,39.675)
NetC706_CH1_2: C706_CH1.2 U701_CH1.15 | length 2
  Top Layer w0.25: C706_CH1.2@44.375,16.3 44.575,16.3 44.975,16.7 U701_CH1.15@46.25,16.7
NetC706_CH2_2: C706_CH2.2 U701_CH2.15 | length 1.5
  Top Layer w0.2: C706_CH2.2@115.4,26.2 115.475,26.125 U701_CH2.15@116.9,26.125
NetC802_DCH1_1: C802_DCH1.1 R805_DCH1.1 U802_DCH1.2 | length 5.5
  Top Layer w0.5: R805_DCH1.1@34.225,58.5 36.3,58.5 36.473,58.673 37.273,58.673 38.162,59.562 39.227,59.562 U802_DCH1.2@39.3,59.635
NetC802_DCH1_2: C802_DCH1.2 R802_DCH1.1 U802_DCH1.1 | length 5.2
  Top Layer w0.5: R802_DCH1.1@34.225,61 34.44,60.785 C802_DCH1.2@36.3,60.785 36.42,60.905 U802_DCH1.1@39.3,60.905
NetC802_DCH2_1: C802_DCH2.1 R805_DCH2.1 U802_DCH2.2 | length 4.8
  Top Layer w0.6: R805_DCH2.1@103.8,39.1 C802_DCH2.1@103.8,36.725 103.95,36.575 103.95,35.9 104.21,35.64 104.21,34.525 U802_DCH2.2@104.235,34.5
NetC802_DCH2_2: C802_DCH2.2 R802_DCH2.1 U802_DCH2.1 | length 4.3
  Top Layer w0.6: U802_DCH2.1@105.505,34.5 105.505,35.93 106.1,36.525 C802_DCH2.2@106.1,36.725 R802_DCH2.1@107.9,36.725
NetC901_1: C901.1 U901.3 | length 2.4
  Top Layer w0.2: U901.3@28.775,76.35 28.782,76.357 28.782,77.35 v1(28.789,77.357)
  Bottom Layer w0.2: v1(28.789,77.357) 28.856,77.424 29.174,77.424 29.7,77.95 C901.1@29.7,78.15
NetC901_2: C901.2 L901.1 TP901.1 U901.12 | length 6
  Bottom Layer w0.2: TP901.1@33.495,80.75 TP901.1@33.587,80.75
  Bottom Layer w0.4: v1(32.475,76.075) 32.475,77.075 31.6,77.95 C901.2@31.6,78.15 31.6,78.35 33.587,80.337 TP901.1@33.587,80.75
NetC904_1: C904.1 R902.1 R904.2 U901.7 | length 7.1
  Top Layer w0.3: C904.1@24.85,73.3 25.033,73.483 R904.2@25.033,75.4 ; R902.1@25.033,77.65 R904.2@25.033,75.4 ; U901.7@27.55,75 25.433,75 R904.2@25.033,75.4
NetC909_2: C909.2 R903.1 U901.5 | length 14.2
  Top Layer w0.2: R903.1@23.125,71.35 23.125,71.5 24.033,72.408 24.033,76.399 24.158,76.524 24.158,78.691 C909.2@24.958,79.491 ; C909.2@24.958,79.691 C909.2@24.958,79.491 ; U901.5@27.55,76 26.613,76 26.338,76.275 26.325,76.275 26.2,76.4 26.2,78.249 C909.2@24.958,79.491
NetD301_KCELL1_A: D301_KCELL1.A K301_KCELL1.A1 Q301_KCELL1.D | length 7.7
  Bottom Layer w0.4: Q301_KCELL1.D@30.32,22.2 30.32,20.58 31.57,19.33 D301_KCELL1.A@31.57,18.095 ; D301_KCELL1.A@31.57,18.1 31.8,17.869 31.8,17.243 32.035,17.009 33.311,17.009 K301_KCELL1.A1@33.67,16.65
NetD301_KCELL2_A: D301_KCELL2.A K301_KCELL2.A1 Q301_KCELL2.D | length 6.2
  Bottom Layer w0.3: Q301_KCELL2.D@122.5,52.3 D301_KCELL2.A@122.5,48.8 122.5,46.2 K301_KCELL2.A1@122.55,46.15
NetD302_KCELL1_A: D302_KCELL1.A K302_KCELL1.A1 Q302_KCELL1.D | length 12.8
  Bottom Layer w0.4: Q302_KCELL1.D@14.975,23.8 14.975,23.734 14.875,23.634 14.309,23.634 13.325,22.65 13.325,20.443 14.159,19.609 16.741,19.609 18.25,18.1 D302_KCELL1.A@18.25,18 18.32,17.93 18.97,17.93 K302_KCELL1.A1@20.15,16.75
NetD302_KCELL2_A: D302_KCELL2.A K302_KCELL2.A1 Q302_KCELL2.D | length 6.6
  Bottom Layer w0.2: K302_KCELL2.A1@108,46.2 K302_KCELL2.A1@108.8,47 ; Q302_KCELL2.D@108.75,52.425 Q302_KCELL2.D@108.8,52.375
  Bottom Layer w0.4: K302_KCELL2.A1@108.8,47 D302_KCELL2.A@108.8,49
  Bottom Layer w0.5: D302_KCELL2.A@108.8,49 Q302_KCELL2.D@108.8,52.375
NetD601_A: D601.A R609.2 | length 2.1
  Top Layer w0.6: R609.2@71.6,66 71.65,66.05 71.65,67.975 D601.A@71.7,68.025
NetD602_A: D602.A R610.2 | length 2.1
  Top Layer w0.6: R610.2@69,66 69.033,66.033 69.033,67.992 D602.A@69.067,68.025
NetD603_A: D603.A R611.2 | length 2
  Top Layer w0.6: R611.2@66.4,66 66.417,66.017 66.417,68.008 D603.A@66.433,68.025
NetD604_A: D604.A R612.2 | length 2
  Top Layer w0.6: R612.2@63.8,66 D604.A@63.8,68.025
NetD902_A: D902.A R906.1 | length 2.1
  Top Layer w0.2: R906.1@52.025,80.3 R906.1@52.15,80.425
  Top Layer w0.5: R906.1@52.15,80.425 D902.A@52.15,82.3
NetK301_KCELL1_11: K301_KCELL1.11 K302_KCELL1.14
NetK301_KCELL1_14: K301_KCELL1.14 U801_DCH1.1 U801_DCH1.2
NetK301_KCELL2_11: K301_KCELL2.11 K302_KCELL2.14
NetK301_KCELL2_14: K301_KCELL2.14 U801_DCH2.1 U801_DCH2.2
NetL701_CH1_2: L701_CH1.2 R701_CH1.2 U701_CH1.12 | length 13.8
  Top Layer w0.2: v1(46.52,19.6) 46.551,19.6 47.775,18.376 U701_CH1.12@47.775,17.55
  Bottom Layer w0.2: v1(46.52,19.6) 46.52,28.382 v1(48.225,30.087)
NetL701_CH2_2: L701_CH2.2 R701_CH2.2 U701_CH2.12 | length 15.7
  Top Layer w0.25: v1(117.225,29.6) 117.67,29.6 118.425,28.845 U701_CH2.12@118.425,26.975
  Top Layer w1: R701_CH2.2@119.275,41.05 119.3,41.025 L701_CH2.2@119.3,38.3
  Bottom Layer w0.25: v1(117.225,29.6) 117.225,36.2 v1(119.312,38.288)
NetQ301_KCELL1_G: Q301_KCELL1.G R301_KCELL1.2 | length 2.9
  Bottom Layer w0.4: R301_KCELL1.2@31.945,25.7 31.945,25.6 32.32,25.225 32.42,25.225 32.72,24.925 Q301_KCELL1.G@32.72,23.15
NetQ301_KCELL2_G: Q301_KCELL2.G R301_KCELL2.2 | length 2.3
  Bottom Layer w0.2: R301_KCELL2.2@117.8,51.375 120.075,51.375 Q301_KCELL2.G@120.1,51.35
NetQ302_KCELL1_G: Q302_KCELL1.G R303_KCELL1.2 | length 5
  Bottom Layer w0.4: R303_KCELL1.2@14.475,25.75 14.475,25.65 14.85,25.275 14.95,25.275 15.925,24.3 Q302_KCELL1.G@15.925,21.4
NetQ302_KCELL2_G: Q302_KCELL2.G R303_KCELL2.2 | length 3.8
  Bottom Layer w0.3: R303_KCELL2.2@103.05,50.3 105.025,50.3 106.225,51.5 106.325,51.5 Q302_KCELL2.G@106.35,51.475
NetQ801_DCH1_1: Q801_DCH1.1 R802_DCH1.2 | length 16.4
  Top Layer w0.6: Q801_DCH1.1@17,59.6 17.5,59.1 28.325,59.1 30.125,60.9 32.275,60.9 R802_DCH1.2@32.375,61
NetQ801_DCH1_2: Q801_DCH1.2 U801_DCH1.3 U801_DCH1.4
NetQ801_DCH1_3: Q801_DCH1.3 R805_DCH1.2 R806_DCH1.1 R807_DCH1.2 R808_DCH1.2 R809_DCH1.1 | length 17.1
  Top Layer w1: v1(30.2,58.3) 30.4,58.5 R805_DCH1.2@32.375,58.5
  Bottom Layer w1: Q801_DCH1.3@17,54.4 26.3,54.4 v1(30.2,58.3)
NetQ801_DCH2_1: Q801_DCH2.1 R802_DCH2.2 | length 32.7
  Top Layer w0.6: R802_DCH2.2@107.9,38.575 107.9,39.85 v1(108.1,40.05)
  Bottom Layer w0.6: v1(108.1,40.05) 108.7,40.65 120.675,40.65 129.2,49.175 Q801_DCH2.1@129.2,55.475
NetQ801_DCH2_2: Q801_DCH2.2 U801_DCH2.3 U801_DCH2.4
NetQ801_DCH2_3: Q801_DCH2.3 R805_DCH2.2 R806_DCH2.1 R807_DCH2.2 R808_DCH2.2 R809_DCH2.1 | length 40
  Top Layer w0.6: R805_DCH2.2@103.8,40.95 112.175,40.95 v1(113.7,39.425)
  Bottom Layer w0.6: v1(113.7,39.425) 118.788,39.425 118.826,39.463 119.799,39.463 119.837,39.425 121.85,39.425 134.4,51.975 Q801_DCH2.3@134.4,55.475
NetR301_KCELL1_1: R301_KCELL1.1 R302_KCELL1.2 U601.60 | length 50
  Top Layer w0.25: v2(28.72,25.7) 28.72,30.75 50.37,52.4 U601.60@60.075,52.4
  Bottom Layer w0.4: R302_KCELL1.2@28.52,23.125 28.52,24.125 R301_KCELL1.1@30.095,25.7 v2(28.72,25.7)
NetR301_KCELL2_1: R301_KCELL2.1 R302_KCELL2.2 U601.2 | length 48.2
  Top Layer w0.2: U601.2@75.125,45.4 77.2,45.4 v1(77.7,44.9)
  Bottom Layer w0.2: v1(77.7,44.9) 110.05,44.9 112.45,47.3 112.45,50.475 115.2,53.225 R302_KCELL2.2@115.3,53.225 R301_KCELL2.1@117.8,53.225
NetR303_KCELL1_1: R303_KCELL1.1 R304_KCELL1.2 U601.59 | length 57.8
  Top Layer w0.25: v2(20.25,23.525) 49.625,52.9 U601.59@60.075,52.9
  Bottom Layer w0.4: R303_KCELL1.1@16.325,25.75 17.914,25.75 18.75,24.914 R304_KCELL1.2@18.75,23.525 ; R304_KCELL1.2@18.65,23.525 v2(20.25,23.525)
NetR303_KCELL2_1: R303_KCELL2.1 R304_KCELL2.2 U601.3 | length 30.6
  Top Layer w0.2: U601.3@75.125,45.9 76.72,45.9 v1(77.244,46.424)
  Bottom Layer w0.2: v1(77.244,46.424) 77.293,46.375 81.038,46.375 81.063,46.4 89.233,46.4 94.983,52.15 R304_KCELL2.2@100.5,52.15 R303_KCELL2.1@103.05,52.15
NetR702_CH1_1: R702_CH1.1 R703_CH1.2 U701_CH1.6 | length 5.2
  Top Layer w0.2: U701_CH1.6@49.95,15.7 51.625,15.7 52.475,14.85 R702_CH1.1@52.575,14.85 54.675,14.85 R703_CH1.2@54.75,14.775
NetR702_CH1_2: R702_CH1.2 U701_CH1.7 | length 2.8
  Top Layer w0.25: U701_CH1.7@49.95,16.2 51.975,16.2 52.475,16.7 R702_CH1.2@52.575,16.7
NetR702_CH2_1: R702_CH2.1 R703_CH2.2 U701_CH2.6 | length 6.4
  Top Layer w0.2: U701_CH2.6@120.6,25.125 U701_CH2.6@120.605,25.12
  Top Layer w0.3: U701_CH2.6@120.605,25.125 121.338,25.125 121.455,25.008 v2(121.563,25.008)
  Bottom Layer w0.3: v2(121.563,25.008) 121.64,25.084 122.359,25.084 123.025,25.75 R702_CH2.1@124.45,25.75
  Bottom Layer w0.5: R703_CH2.2@124.45,23.6 R702_CH2.1@124.45,25.75
NetR702_CH2_2: R702_CH2.2 U701_CH2.7 | length 4.7
  Top Layer w0.3: U701_CH2.7@120.6,25.625 121.195,25.625 121.295,25.725 121.303,25.725 121.391,25.814 121.674,25.814 v2(121.751,25.89)
  Bottom Layer w0.3: v2(121.751,25.89) 123.46,27.6 R702_CH2.2@124.45,27.6
NetR801_DCH1_1: R801_DCH1.1 U801_DCH1.6 | length 4
  Top Layer w0.3: U801_DCH1.6@25.635,60.7 25.635,61.195 27.315,62.875 27.575,62.875 28.05,63.35 R801_DCH1.1@28.05,63.5
NetR801_DCH2_1: R801_DCH2.1 U801_DCH2.6 | length 5.4
  Top Layer w0.4: U801_DCH2.6@130.335,71.5 130.335,71.995 130.571,72.231 130.591,72.231 130.825,72.465 130.825,75.825 131.35,76.35 R801_DCH2.1@131.35,76.5
NetR803_DCH1_2: R803_DCH1.2 R804_DCH1.1 U802_DCH1.6 | length 6.9
  Top Layer w0.2: U802_DCH1.6@44.7,58.365 46.811,58.365 46.851,58.325 49.4,58.325 ; R803_DCH1.2@49.4,57.095 49.4,58.325 ; R804_DCH1.1@49.4,59.3 49.4,58.325
NetR803_DCH2_2: R803_DCH2.2 R804_DCH2.1 U802_DCH2.6 | length 7.1
  Top Layer w0.6: U802_DCH2.6@102.965,29.1 102.94,29.075 102.94,28.184 102.425,27.669 102.425,25.943 102.794,25.574 102.801,25.574 103.5,24.875 R804_DCH2.1@103.6,24.875 R803_DCH2.2@103.6,22.8
NetR804_DCH1_2: R804_DCH1.2 U802_DCH1.3 U802_DCH1.7 | length 8.9
  Top Layer w0.3: U802_DCH1.3@39.3,58.365 42.93,58.365 44.2,59.635 U802_DCH1.7@44.7,59.635 47.215,59.635 R804_DCH1.2@47.55,59.3
NetR804_DCH2_2: R804_DCH2.2 U802_DCH2.3 U802_DCH2.7 | length 8.6
  Top Layer w0.3: U802_DCH2.3@102.965,34.5 102.965,30.87 104.235,29.6 104.235,27.36 104.025,27.15 104.025,27.05 103.7,26.725 R804_DCH2.2@103.6,26.725
NetR901_1: R901.1 U901.9 | length 5.2
  Top Layer w0.25: R901.1@26.85,70.325 27,70.325 27.475,70.8 27.475,72.512 28.775,73.812 U901.9@28.775,74.65
NetR903_2: R903.2 U901.8 | length 5.1
  Top Layer w0.25: R903.2@24.875,71.35 24.958,71.433 25.633,71.433 28.275,74.075 U901.8@28.275,74.65
NetR905_2: R905.2 U901.4 | length 3.7
  Top Layer w0.2: v1(27.325,77.65) 27.332,77.643 27.732,77.643 28.275,77.1 U901.4@28.275,76.35
  Bottom Layer w0.2: R905.2@26.6,79.025 26.75,79.025 27.275,78.5 27.275,77.7 v1(27.325,77.65)
NetU101_8: U101.8 U201.5 | length 20.6
  Top Layer w0.2: U201.5@72.025,30.575 72.078,30.523 73.227,30.523 73.705,30.045 73.705,18.476 74.481,17.7 78.41,17.7 79.41,18.7 U101.8@79.41,19.35
NetU101_9: U101.9 U201.3 | length 17.7
  Top Layer w0.25: U201.3@72.025,31.875 74.031,31.875 74.481,31.425 v1(74.5,31.425) ; U101.9@78.14,19.35 78.14,21.419 78.41,21.689 v1(78.41,21.77)
  Bottom Layer w0.25: v1(74.5,31.425) 75.552,31.425 79.125,27.852 79.125,22.485 v1(78.41,21.77)
NetU101_10: U101.10 U201.19 | length 16.6
  Top Layer w0.25: U101.10@76.87,19.35 76.87,21.77 80.4,25.3 80.4,31.537 79.412,32.525 U201.19@77.875,32.525
NetU101_11: U101.11 U201.15 | length 14.2
  Top Layer w0.25: U101.11@75.6,19.35 75.6,21.3 79.95,25.65 79.95,29.465 79.49,29.925 U201.15@77.875,29.925
NetU201_2: U201.2 U601.90 | length 14.6
  Top Layer w0.2: U601.90@68.6,43.375 68.6,42 68.134,41.534 68.134,33.231 68.94,32.425 70.649,32.425 70.749,32.525 U201.2@72.025,32.525
NetU201_6: U201.6 U601.89 | length 17.5
  Top Layer w0.25: U601.89@68.1,43.375 68.1,42.375 67.45,41.725 67.45,31.259 68.766,29.943 U201.6@72.025,29.943
NetU201_16: U201.16 U601.77 | length 28.2
  Top Layer w0.2: U601.77@62.1,43.375 62.1,31.35 v2(63,30.45) ; v2(75.448,30.575) U201.16@77.875,30.575
  Bottom Layer w0.2: v2(63,30.45) 63.063,30.512 75.385,30.512 v2(75.448,30.575)
NetU201_18: U201.18 U601.91 | length 16
  Top Layer w0.25: U601.91@69.1,43.375 69.1,39.173 76.398,31.875 U201.18@77.875,31.875
NetU501_1: U501.1 U601.70 | length 26.4
  Top Layer w0.2: U601.70@60.075,47.4 v1(71.1,47.4) ; v1(79.575,39.125) 79.605,39.125 81.7,37.03 U501.1@82.175,37.03
  Bottom Layer w0.2: v1(71.1,47.4) 79.308,39.192 79.508,39.192 v1(79.575,39.125)
NetU501_4: U501.4 U601.71 | length 29.8
  Top Layer w0.2: U601.71@60.075,46.9 66.083,46.9 66.783,46.2 72.117,46.2 77.638,40.679 77.638,37.282 81.7,33.22 U501.4@82.175,33.22
NRST: J7.5 U601.14 | length 36.2
  Top Layer w0.2: v2(72.975,51.45) 73.015,51.41 75.115,51.41 U601.14@75.125,51.4
  Bottom Layer w0.2: v2(72.975,51.45) 71,53.425 71,73.92 J7.5@78.58,81.5
NTC1+: C401_NTC2.2 J1.1 R401_NTC2.1 R402_NTC2.1 | length 14.1
  Bottom Layer w0.4: C401_NTC2.2@41.65,14.3 41.637,14.287 41.637,9.513 R402_NTC2.1@41.625,9.5 41.625,9.4 46.85,4.175 47.416,4.175 47.49,4.1 47.65,4.1 J1.1@48.35,3.4
NTC2+: C401_NTC1.2 J2.1 R401_NTC1.1 R402_NTC1.1 | length 10.4
  Top Layer w0.2: R402_NTC1.1@94.325,70.8 R401_NTC1.1@94.325,72.9 94.35,72.925 C401_NTC1.2@94.35,74.8 J2.1@94.35,81.14
S_CELL1+: J5.2 R101.2 | length 9.2
  Top Layer w0.5: R101.2@61.5,9.65 61.5,8.77 J5.2@67.4,2.87
S_CELL1-: J5.1 R102.2 | length 6.9
  Top Layer w0.5: R102.2@69.5,9.55 69.525,9.55 69.9,9.175 J5.1@69.9,2.87
S_CELL2+: J6.2 R103.2 | length 8.6
  Top Layer w0.5: R103.2@77.7,9.45 77.7,7.32 J6.2@82.25,2.77
S_CELL2-: J6.1 R104.2 | length 7.1
  Top Layer w0.5: J6.1@84.75,2.77 86,4.02 R104.2@86,9.4
SWCLK: J7.2 U601.76 | length 42
  Top Layer w0.2: U601.76@61.6,43.375 61.6,44.945 62.055,45.4 v1(62.1,45.4)
  Bottom Layer w0.2: v1(62.1,45.4) 70.6,53.9 70.6,80.761 70.96,81.121 J7.2@70.96,81.5
SWDIO: J7.4 U601.72 | length 49.4
  Top Layer w0.2: U601.72@60.075,46.4 61.655,46.4 61.83,46.225 v1(61.925,46.225)
  Bottom Layer w0.2: v1(61.925,46.225) 69.877,54.177 69.877,81.307 cw(c70.96,81.5) 69.877,81.693 69.877,82.821 69.936,82.879 70.456,83.4 74.892,83.4 75.838,82.454 75.838,81.702 J7.4@76.04,81.5
U_LED_1: R609.1 U601.38 | length 7.6
  Top Layer w0.3: U601.38@67.6,58.425 67.6,60.483 70.842,63.725 71.175,63.725 R609.1@71.6,64.15
U_LED_2: R610.1 U601.39 | length 6.5
  Top Layer w0.3: U601.39@67.1,58.425 67.1,60.7 69,62.6 R610.1@69,64.15
U_LED_3: R611.1 U601.40 | length 5.8
  Top Layer w0.3: R611.1@66.4,64.15 66.6,63.95 U601.40@66.6,58.425
U_LED_4: R612.1 U601.41 | length 6.7
  Top Layer w0.3: R612.1@63.8,64.15 63.8,63.2 66.1,60.9 U601.41@66.1,58.425
XTAL_IN: C608.1 U601.12 Y601.3 | length 11.2
  Top Layer w0.25: U601.12@75.125,50.4 78.35,50.4 Y601.3@78.625,50.125 80.465,50.125 81.49,51.15 84.425,51.15 85.25,50.325 C608.1@85.25,50.125
XTAL_OUT: C609.1 U601.13 Y601.1 | length 10.8
  Top Layer w0.25: U601.13@75.125,50.9 77.44,50.9 77.94,51.4 79.56,51.4 80.585,52.425 Y601.1@82.425,52.425 C609.1@85.25,52.425
pads on no net: J1.0 J2.0 J3. J4. J5. J6. J7.6 K302_KCELL1.12 K302_KCELL2.12 U101.5 U101.6 U201.4 U201.7 U201.8 U201.9 U201.12 U201.13 U201.14 U201.17 U601.1 U601.4 U601.5 U601.8 U601.9 U601.15 U601.23 U601.26 U601.31 U601.32 U601.33 U601.37 U601.42 U601.43 U601.44 U601.45 U601.46 U601.51 U601.52 U601.53 U601.54 U601.55 U601.56 U601.57 U601.58 U601.61 U601.62 U601.67 U601.68 U601.69 U601.73 U601.78 U601.79 U601.80 U601.82 U601.83 U601.86 U601.87 U601.88 U601.94 U601.95 U601.96 U601.97 U601.98 U701_CH1.16 U701_CH1.17 U701_CH1.18 U701_CH2.16 U701_CH2.17 U701_CH2.18
copper on no net:
  other v6: 23.48,9.8 16.845,82.75 102.48,82.75

## Polygon pours and split planes (outlines as drawn)
GND on GND "GND_L02_P005" (solid, pour order 5): 5,0 cw(c5,5) 0,5 0,80 cw(c5,80) 5,85 145,85 cw(c145,80) 150,80 150,5 cw(c145,5) 145,0
GND on GND "GND-GND" (solid, pour order 0): 0,5 0,80 cw(c5,80) 5,85 145,85 cw(c145,80) 150,80 150,5 cw(c145,5) 145,0 5,0 cw(c5,5)
GND on Top Layer "GND_L01_P074" (solid, remove dead copper, pour order 74): 5.581,-0.176 cw(c5.581,4.824) 0.581,4.824 0.581,79.824 cw(c5.581,79.824) 5.581,84.824 145.581,84.824 cw(c145.581,79.824) 150.581,79.824 150.581,4.824 cw(c145.581,4.824) 145.581,-0.176
NetC701_CH2_1 on Top Layer "NETC701_CH2_1_L01_P050_DIRECT" (solid, pour order 50): 118.9,23.75 118.9,24.026 118.9,27.875 118.175,28.6 118.175,32.675 120.4,32.675 120.425,32.65 120.425,29 119.3,27.875 119.3,23.75 119.074,23.75
NetK301_KCELL2_11 on Top Layer "NETK301_KCELL2_11_L01_P014_DIRECT" (solid, pour order 14): 106.75,71.5 106.75,68.25 111.25,68.25 114.5,65 116.25,65 116.25,67.25 112,71.5
CELL2+ on Top Layer "CELL2+_L01_P013_DIRECT" (solid, pour order 13): 99.5,79 101.75,79 101.75,77.25 109.25,77.25 110.5,78.5 112,78.5 112,75.75 110,73.75 102.25,73.75 102.25,65 102,64.75 99,64.75 99,78.5
+12V on Top Layer "+12V_L01_P034_DIRECT" (solid, pour order 34): 118.043,24.743 118.043,23.207 118.85,22.4 118.85,16.575 116.848,16.575 116.848,22.6 117.6,23.275 117.6,24.743
NetQ801_DCH2_2 on Top Layer "NETQ801_DCH2_2_L01_P065_DIRECT" (solid, pour order 65): 130.025,67.15 130.075,67.2 132.25,67.2 133.125,66.325 133.125,53.75 130.875,53.75 130.5,54.125 130.5,64.625 130.05,65.075 130.05,67.15
NetC701_CH1_1 on Top Layer "NETC701_CH1_1_L01_P060_DIRECT" (solid, pour order 60): 48.2,14.1 48.2,18.275 47.225,19.25 47.225,23.25 49.825,23.25 49.825,19.641 48.7,18.25 48.7,14.1
NetQ801_DCH1_3 on Top Layer "NETQ801_DCH1_3_L01_P053_DIRECT" (solid, pour order 53): 17.95,55.4 17.975,55.375 17.975,52.225 12.3,46.55 0.5,46.55 0.5,67.35 2.15,69 11.05,69 15.45,64.6 15.45,55.425 17.9,55.425
+12V on Top Layer "+12V_L01_P061_DIRECT" (solid, pour order 61): 46.95,15.55 47.325,15.55 47.325,12.575 47.825,12.075 47.825,7.9 47.775,7.85 44.375,7.85 44.375,12.4 44.55,12.575 46.298,12.575 46.298,13.848 46.95,14.5
NetL701_CH1_2 on Top Layer "NETL701_CH1_2_L01_P059_DIRECT" (solid, pour order 59): 47.225,32.525 47.225,27.65 49.825,27.65 49.825,32.525
NetC704_CH1_2 on Top Layer "NETC704_CH1_2_L01_P058_DIRECT" (solid, pour order 58): 33.325,34.625 31.825,33.125 31.825,31.7 34.075,29.45 45.875,29.45 45.875,33.05 43.1,33.05 42.325,33.825 35.35,33.825 34.575,34.6 33.25,34.6
NetQ801_DCH1_2 on Top Layer "NETQ801_DCH1_2_L01_P056_DIRECT" (solid, pour order 56): 25.3,54.45 25.3,56.45 18.059,56.45 17.5,55.891 15.975,55.891 15.975,57.95 15.95,57.975 16.275,58.3 26.625,58.3 27.4,57.525 27.375,57.5 27.375,54.45
NetK301_KCELL1_14 on Top Layer "NETK301_KCELL1_14_L01_P055_DIRECT" (solid, pour order 55): 24.85,55.85 24.85,50.05 33.45,41.45 34.95,41.45 34.95,39.425 34.7,39.175 29.325,39.175 22.759,45.741 22.759,56.1 24.6,56.1
NetK301_KCELL1_11 on Top Layer "NETK301_KCELL1_11_L01_P054_DIRECT" (solid, pour order 54): 18.575,41.575 18.575,41.4 18.575,38.375 21.475,38.375 24.225,35.625 28.15,35.625 28.15,37.975 24.375,41.75 18.575,41.75
NetC704_CH2_2 on Top Layer "NETC704_CH2_2_L01_P052_DIRECT" (solid, pour order 52): 121.15,64.225 121.15,51.625 124.975,47.8 124.975,42.875 124.2,42.1 121.8,42.1 121.8,39.825 121.775,39.8 128.6,39.8 128.6,49.65 124.55,53.7 124.55,64.125
+12V on Top Layer "+12V_L01_P046_DIRECT" (solid, pour order 46): 16.3,78.75 16.15,78.9 13.4,78.9 13.4,80.525 17.2,84.325 32.575,84.325 32.575,81.175 31.3,79.9 31.3,77.816 30.916,77.816 29.65,76.55 29.65,76.147 29.278,76.147 29.175,76.25 29.224,76.3 29.224,80.491 20.3,80.491 20.234,80.425 16.825,80.425 16.25,79.85 16.25,79.175
NetQ801_DCH2_3 on Top Layer "NETQ801_DCH2_3_L01_P049_DIRECT" (solid, pour order 49): 133.3,56.95 133.3,18.975 148.275,18.975 148.275,46.975 138.3,56.95
+12V on Top Layer "+12V_L01_P043_DIRECT" (solid, pour order 43): 13.4,79.3 13.4,71.1 17.6,66.9 30.1,66.9 30.1,70.525 30.275,70.7 29.775,71.2 29.775,74.775 29.55,75 29.125,75 29.125,73.774 29.224,73.674 28.575,73.025 28.475,73.025 28.475,70.602 27.575,69.702 27.575,69.45 22.9,69.45 16.3,76.05 16.3,79.6 13.5,79.6 13.4,79.7
NetC901_2 on Top Layer "NETC901_2_L01_P018_DIRECT" (solid, pour order 18): 28.95,75.75 31.425,75.75 32.475,76.8 34.7,76.8 34.7,74.2 32.402,74.2 31.302,75.3 28.9,75.3 28.9,75.7
+5V on Top Layer "+5V_L01_P020_DIRECT" (solid, pour order 20): 39.1,76.8 39.1,74.2 41.1,74.2 41.9,73.4 41.9,73.2 46.4,73.2 47.175,73.975 47.175,77.45 41.75,77.45 41.1,76.8 40.65,76.8
NetK301_KCELL2_14 on Top Layer "NETK301_KCELL2_14_L01_P015_DIRECT" (solid, pour order 15): 121.25,68.5 124.65,65.1 129.7,65.1 129.7,67.2 127.528,67.2 123.25,71.25 123,71.25 121.25,71.25
3V3_MCU on PWR "3V3_MCU_L03_P071" (solid, pour order 71): 33.15,73.45 33.325,73.625 82.225,73.625 82.225,62.25 91.625,52.85 91.625,32.05 83.25,32.05 81.3,34 81.3,36.16 74.23,36.16 74.2,36.19 71.044,33.034 71.044,31.975 59.225,31.975 49.425,41.775 40.35,41.775 20.912,61.212
+5V on PWR "+5V_L03_P072" (solid, pour order 72): 5,0 cw(c5,5) 0,5 0,80 cw(c5,80) 5,85 145,85 cw(c145,80) 150,80 150,5 cw(c145,5) 145,0
+12V on PWR "+12V_L03_P068_DIRECT" (solid, pour order 68): 118.85,19.788 119.187,19.975 119.3,9.5 116.75,7.075 116.575,7.075 43.875,7.075 42.725,8.225 42.725,15.75 110.9,15.75 115.125,19.975 116.125,19.975
+12V on PWR "+12V_L03_P070_DIRECT" (solid, pour order 70): 15.925,79.725 16.036,79.614 16.036,74.375 14.1,74.375 8.25,67.55 8.25,66.475 8.25,13.15 46.049,13.15 46.624,12.575 46.6,12.551 46.6,7.075 6.825,7.075 1.875,12.025 1.875,79.725 10.55,79.725
GND on Bottom Layer "GND_L04_P073" (solid, remove dead copper, pour order 73): 5,0 cw(c5,5) 0,5 0,80 cw(c5,80) 5,85 145,85 cw(c145,80) 150,80 150,5 cw(c145,5) 145,0
CELL1+ on Bottom Layer "CELL1+_L01_P057_DIRECT" (solid, pour order 57): 20.125,4.175 19.525,4.775 12.575,4.775 7.1,10.25 7.1,39.25 7.738,39.887 14.5,39.887 14.5,35.475 10.85,31.825 9.925,31.825 9.925,13.4 14.325,9 20.45,9 23.375,6.075 23.375,4.475 22.775,4.175

## Silkscreen, mask and mechanical layers (free items; w line width, h text height)
Top Overlay:
  drawing of 38 lines, arcs and shapes, not listed
  text "NTC CELL 2" at 87.502,83.5 h2
  text "CELL 2" at 108.15,83.15 h2
  text "SUPPLY" at 11.827,74.231 h2
  text "Bernat Costa Cesari 2024" at 118.678,12.3 h3
  text "Yosra Azzouz Louahabi" at 118.672,10.125 h3
  text "ETR Cellmeter Slave v1" at 118.678,8.025 h3
  text "CELL 1" at 28.325,1.525 h2
  text "S. CELL 1" at 72.329,0.884 h2
  text "CAN L" at 96.35,0.9 h2
  text "CAN H" at 116.25,0.85 h2
  text "S. CELL 2" at 87.304,0.759 h2
  text "NTC CELL 1" at 48.952,0.275 h2
Mechanical 1:
  lines w0.5: 0,5 ccw(c5,5) 5,0 ; 0,5 ccw(c5,5) 5,0 ; 0,5 0,80 ; 0,80 cw(c5,80) 5,85 ; 0,80 cw(c5,80) 5,85 ; 5,0 145,0 ; 5,85 145,85 ; 5,85 145,85 ; 145,0 ccw(c145,5) 150,5 ; 145,0 ccw(c145,5) 150,5 ; 145,85 cw(c145,80) 150,80 ; 145,85 cw(c145,80) 150,80 ; 150,5 150,80 ; 150,5 150,80